# Altium PCB pcb.PcbDoc
Units mil, origin at the board's own origin, x right, y up, seen from the top; angles counter-clockwise.
Board outline 6000 x 4000 mil, 2 copper layers (Top Layer, Bottom Layer); 18 components, 15 nets, 46 pads, 0 vias.
Unrouted connection lines stored in the file: 1.
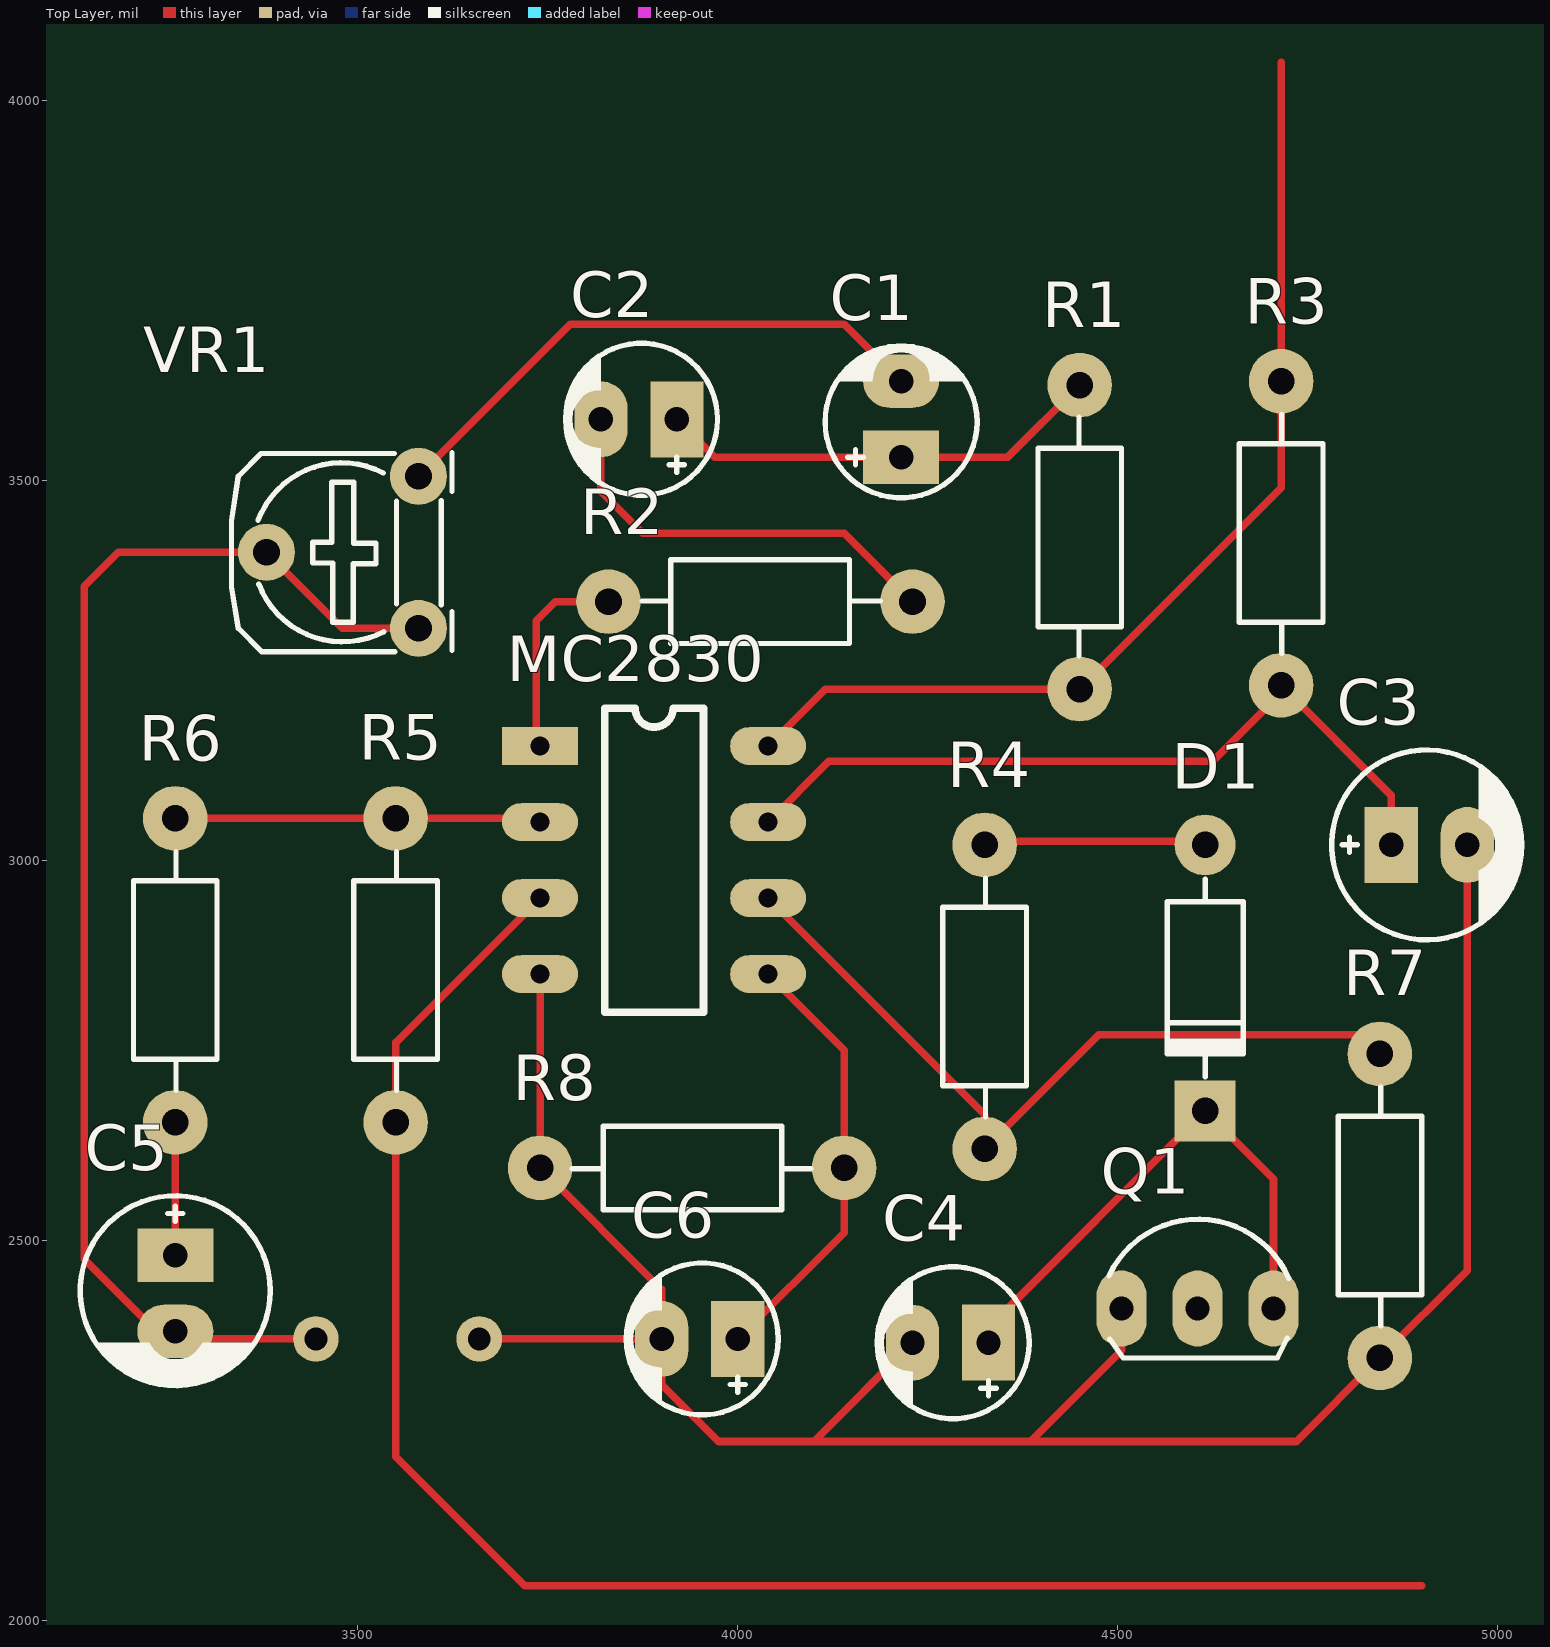
[diagram p0: Top Layer view]
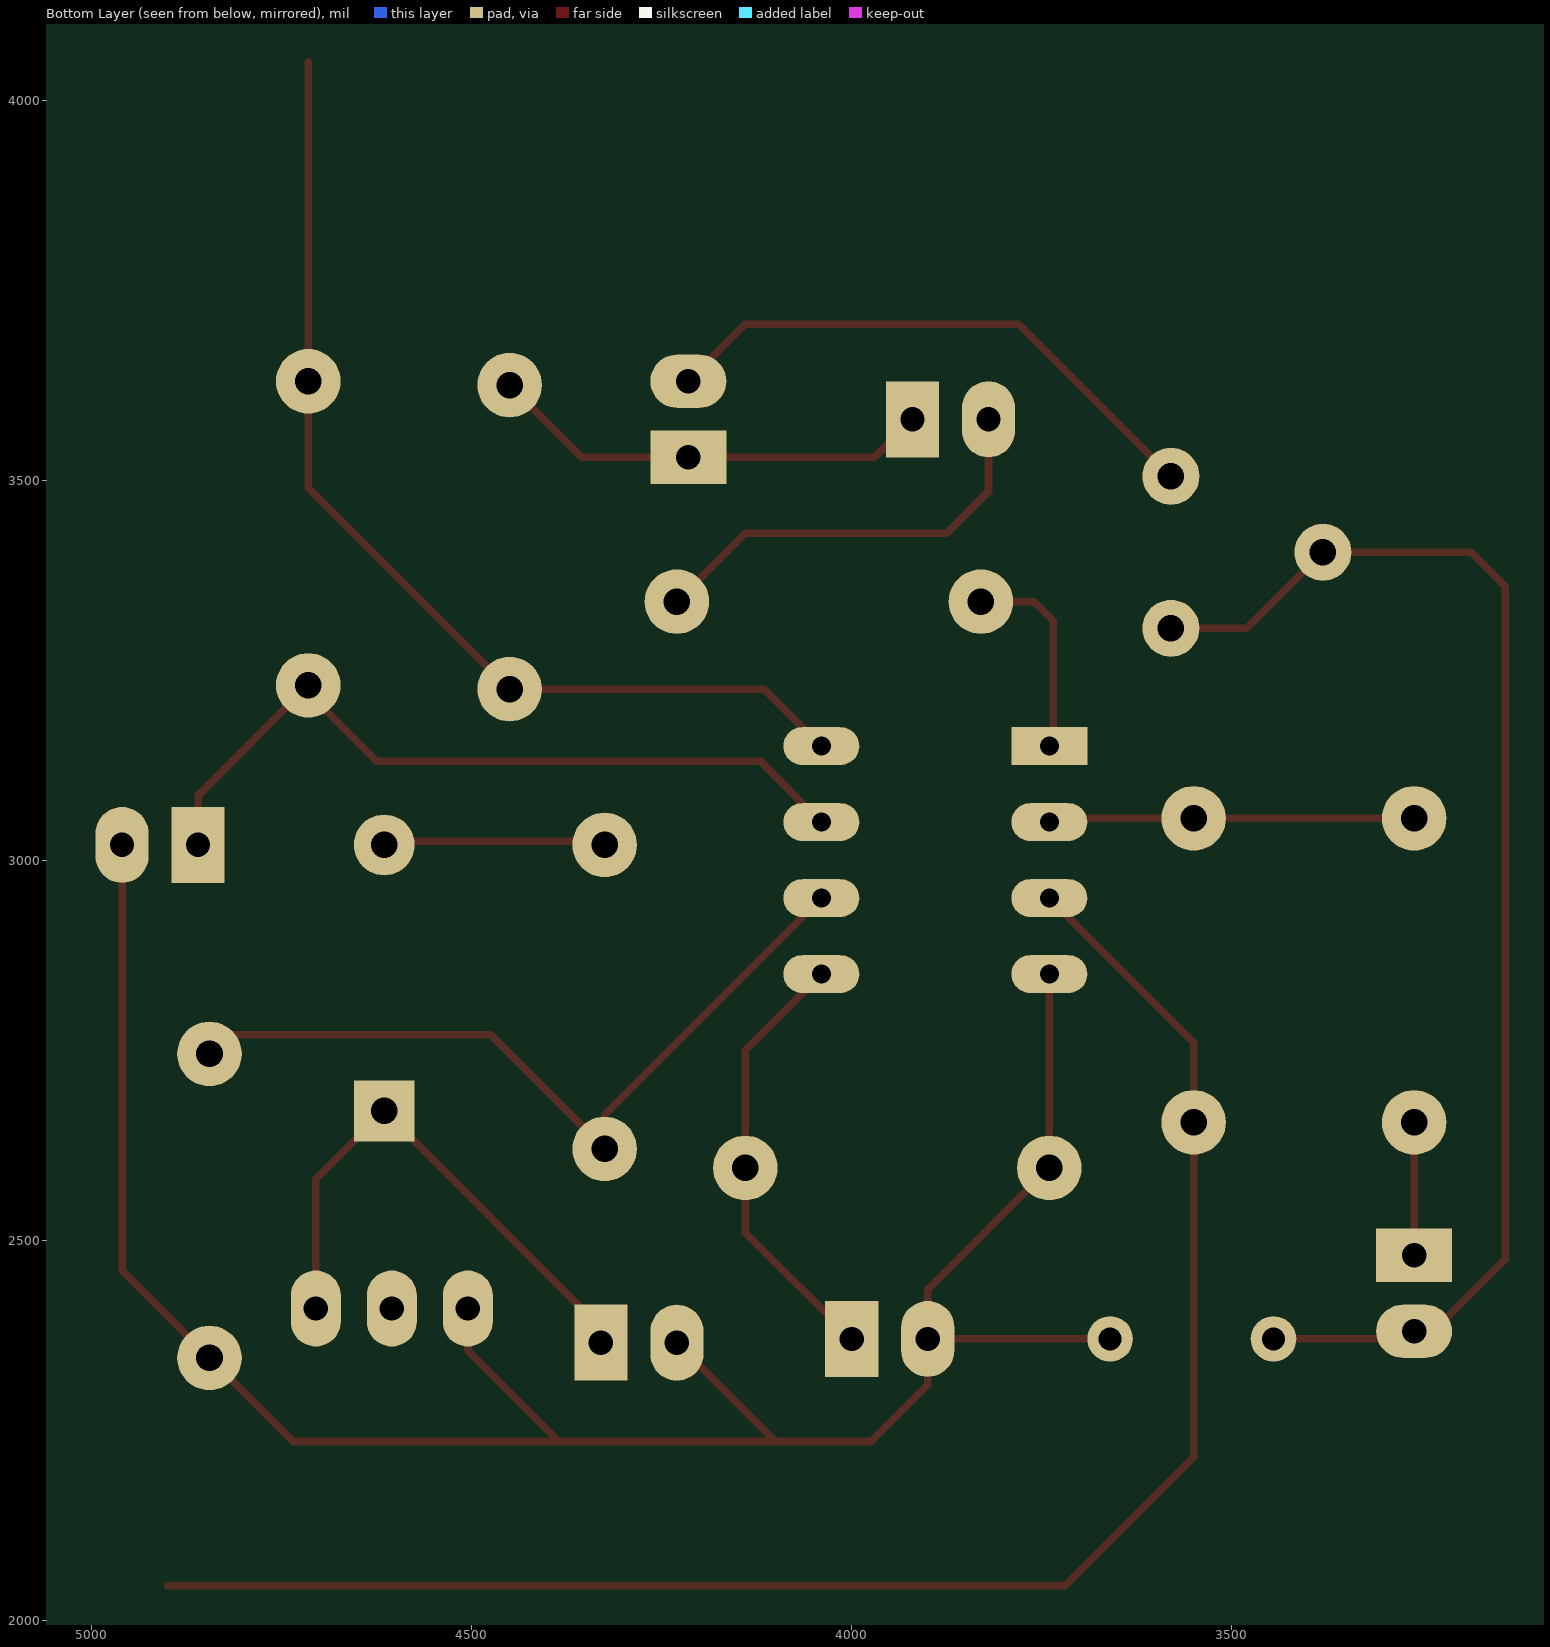
[diagram p1: Bottom Layer view, seen from below]
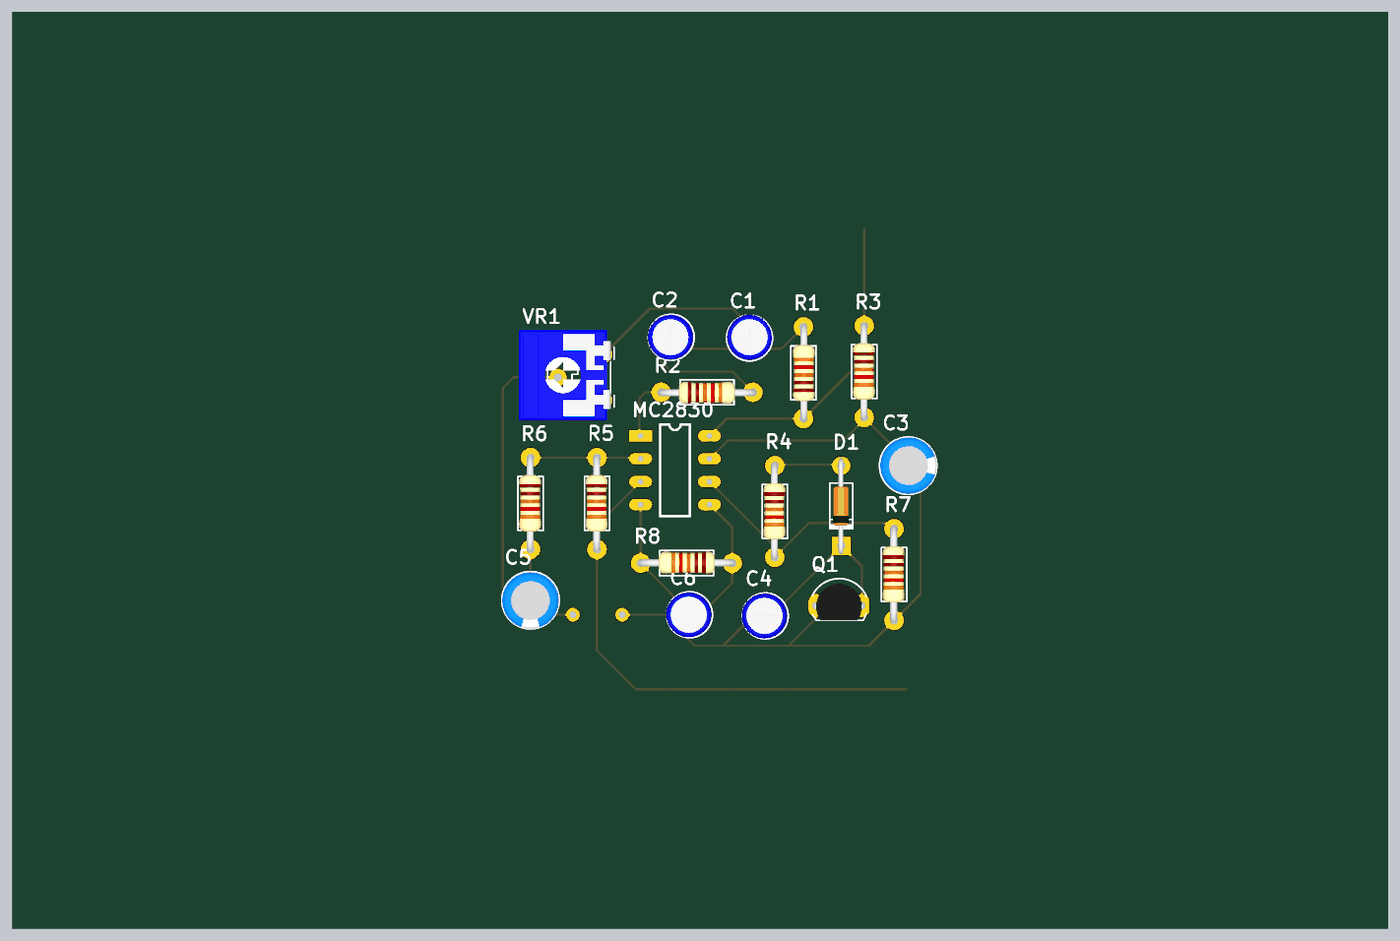
[diagram p2: 3D render of the assembled board from above, using the file's embedded part models]

## Layer stack, top to bottom
Top Solder: solder mask 0.4, Solder Resist, Dk 3.5
Top Layer: signal copper 1.4
Dielectric 1: dielectric 12.6, FR-4, Dk 4.8
Bottom Layer: signal copper 1.4
Bottom Solder: solder mask 0.4, Solder Resist, Dk 3.5

## Board outline
1000,1000 7000,1000 7000,5000 1000,5000

## Design rules (kind name [scope] priority, off if disabled: settings)
Clearance [All] p1: gap=10 ignorepadtopadclearanceinfootprint=FALSE except(0: Arc-Hole Track-Hole SMDPad-Hole THPad-Hole Via-Hole Fill-Hole Poly-Hole Region-Hole Text-Hole)
PolygonConnect [All] p1: connectstyle=Relief reliefconductorwidth=10 reliefentries=4 polygonreliefangle="90 Angle" airgapwidth=10
RoutingVias [All] p1: holewidth=28 width=50 viastyle="Through Hole" minholewidth=28 minwidth=50 maxholewidth=28 maxwidth=50
SolderMaskExpansion [All] p1: expansion=4
Width [All] p1: maxlimit=10 minlimit=10 preferedwidth=10
30 further rules are at their usual default settings.

## Components (designator, comment, footprint, x,y, rotation, side; value= is the part's Value field where it differs from the comment)
C1 "Cap Pol" CP1/2 4215,3530 r90 top value=1uF
C2 "Cap Pol" CP1/2 3920,3580 r180 top value=10uF
C3 "Cap Pol" CP1/2.5 4860,3020 r0 top value=47uF
C4 "Cap Pol" CP1/2 4330,2365 r180 top value=10uF
C5 "Cap Pol" CP1/2.5 3260,2480 r270 top value=47uF
C6 "Cap Pol" CP1/2 4000,2370 r180 top value=2.2uF
D1 "Diode" D1A 4615,3020 r90 top
MC2830 "Component_1" DIP8 3740,3150 r0 top
Q1 "C1815" QTO-92 4605,2410 r0 top
R1 "RESISTOR" "RES 1/2W" 4450,3625 r270 top value=5.6K
R2 "RESISTOR" "RES 1/2W" 4230,3340 r180 top value=33K
R3 "RESISTOR" "RES 1/2W" 4715,3230 r90 top value=1M
R4 "RESISTOR" "RES 1/2W" 4325,2620 r90 top value=1K
R5 "RESISTOR" "RES 1/2W" 3550,2655 r90 top value=100K
R6 "RESISTOR" "RES 1/2W" 3260,2655 r90 top value=1K
R7 "RESISTOR" "RES 1/2W" 4845,2345 r90 top value=15K
R8 "RESISTOR" "RES 1/2W" 3740,2595 r0 top value=1M
VR1 "10K" VR 3580,3305 r90 top value="VR 10K"

## Footprints (in the part's own frame and the unit in brackets; to place one, negate y for a bottom-side part, rotate by r counter-clockwise, add the part's x,y. Pads: shape width x height; smd on the part's side, far side on the other; paste and mask are expansions set on the pad)
CP1/2 [mil] "Tu hoa < 22uF/16>50V"
  rect 70x100 hole 32: 1(0,0)
  oval 70x100 hole 32: 2(100,0)
  silkscreen extent -53,-100 146,100, body extent -49,-99 149,99, height 287
CP1/2.5 [mil] "Tu hoa 33 >100 uF,50V, 220uF/16V,25V"
  rect 70x100 hole 32: 1(0,0)
  oval 70x100 hole 32: 2(100,0)
  silkscreen extent -78,-125 172,125, body extent -76,-124 172,124, height 422
D1A [mil] "Diode 1N4007, W 100mil, L 350mil"
  round 80 hole 35: 1(0,0)
  rect 80x80 hole 35: 2(-350,0)
  silkscreen extent -305,-50 -45,50, body extent -386,-33 34,36, height 84
DIP8 [mil]
  rect 100x50 hole 25: 1(0,0)
  oval 100x50 hole 25: 2(0,-100) 3(0,-200) 4(0,-300) 5(300,-300) 6(300,-200) 7(300,-100) 8(300,0)
  silkscreen extent 85,-350 215,50
QTO-92 [mil] "TO-92"
  oval 66x100 hole 32: 1(-100,0) 2(0,0) 3(100,0)
  silkscreen extent -117,-65 120,118, body extent -109,-66 109,95, height 245
"RES 1/2W" [mil] "R 1/2W, 2 pin, 300mil"
  round 85 hole 35: 1(0,0) 2(400,0)
  silkscreen extent 42,-55 356,55, body extent -12,-45 414,49, height 91
VR [mil] "Resistor Variable"
  round 75 hole 35: 1(0,0) 2(100,200) 3(200,0)
  silkscreen extent -31,-44 231,246, body extent -87,-30 307,372, height 165

## Part data
C1 C2 C3 C4 C5 C6: "Polarized Capacitor (Radial)"
D1: "Default Diode"
Q1: "NPN Bipolar Transistor"
R1 R2 R3 R4 R5 R6 R7 R8: "Resistor"
VR1: library part VR, "Var Resistor"

## Free pads (board coordinates)
  round 60 hole 30: 3(3660,2370) 4(3445,2370)

## Nets (pads, with @x,y where several pads share a name; then routed paths per layer and width w, separated by ;. In a path a pad name is that pad's centre, name@x,y a point inside that pad or via, vN(x,y) a via of type N, cw(c..) or ccw(c..) an arc to the next point about the centre after c; other vN are vias at no path point)
GND: C3.2 C4.2 C5.2 C6.2 MC2830.4 pad.3 pad.4 Q1.1 R7.1 R8.1 VR1.1 VR1.2 | length 4732.6
  Top Layer w10: pad.4 3270,2370 C5.2 3235,2380 3140,2475 3140,3360 3185,3405 VR1.2 3480,3305 VR1.1 ; pad.3 C6.2 ; MC2830.4 R8.1 3900,2435 C6.2 ; C4.2 4100,2235 ; Q1.1 4505,2355 4385,2235 ; C3.2 4960,2460 R7.1 4735,2235 4385,2235 ; C6.2 3900,2310 3975,2235 4100,2235 ; 4100,2235 4385,2235
NetC1_1: C1.1 C2.1 R1.1 | length 590.1
  Top Layer w10: C2.1 3970,3530 C1.1 4355,3530 R1.1
NetC1_2: C1.2 VR1.3 | length 748.9
  Top Layer w10: VR1.3 3780,3705 4140,3705 C1.2
NetC2_2: C2.2 R2.1 | length 565.1
  Top Layer w10: C2.2 3820,3485 3875,3430 4140,3430 R2.1
NetC3_1: C3.1 MC2830.7 R3.1 | length 1025.5
  Top Layer w10: MC2830.7 4120,3130 4625,3130 4715,3220 R3.1 4860,3085 C3.1
NetC4_1: C4.1 D1.2 Q1.3 | length 720.3
  Top Layer w10: C4.1 4330,2385 D1.2 4705,2580 Q1.3
NetC5_1: C5.1 R6.1 | length 175
  Top Layer w10: C5.1 R6.1
NetC6_1: C6.1 MC2830.5 R8.2 | length 579.4
  Top Layer w10: C6.1 4140,2510 R8.2 4140,2750 MC2830.5
NetD1_1: D1.1 R4.2 | length 290
  Top Layer w10: R4.2@4325,3025 D1.1@4615,3025
NetMC2830_1: MC2830.1 R2.2 | length 272.4
  Top Layer w10: MC2830.1 3735,3155 3735,3315 3760,3340 R2.2
NetMC2830_2: MC2830.2 R5.2 R6.2 | length 482.1
  Top Layer w10: R6.2 R5.2 3735,3055 MC2830.2
NetMC2830_6: MC2830.6 R4.1 R7.2 | length 1040.5
  Top Layer w10: MC2830.6 4325,2665 R4.1 4475,2770 4820,2770 R7.2
Output: MC2830.3 R5.1 | length 2234.1
  Top Layer w10: MC2830.3 3550,2760 R5.1 3550,2215 3720,2045 4900,2045
Switch_Output: Q1.2
VCC_5V: MC2830.8 R1.2 R3.2 | length 1375.8
  Top Layer w10: MC2830.8 4115,3225 R1.2 4715,3490 R3.2 4715,4050